# Altium PCB плата пельтье.PcbDoc
Units mm, origin at the board's own origin, x right, y up, seen from the top; angles counter-clockwise.
Board outline 50 x 50 mm, 4 copper layers (Top Layer, +5V, GND, Bottom Layer), stack 0.778 mm thick; 72 components, 65 nets, 252 pads, 42 vias.
Unrouted connection lines stored in the file: 6.
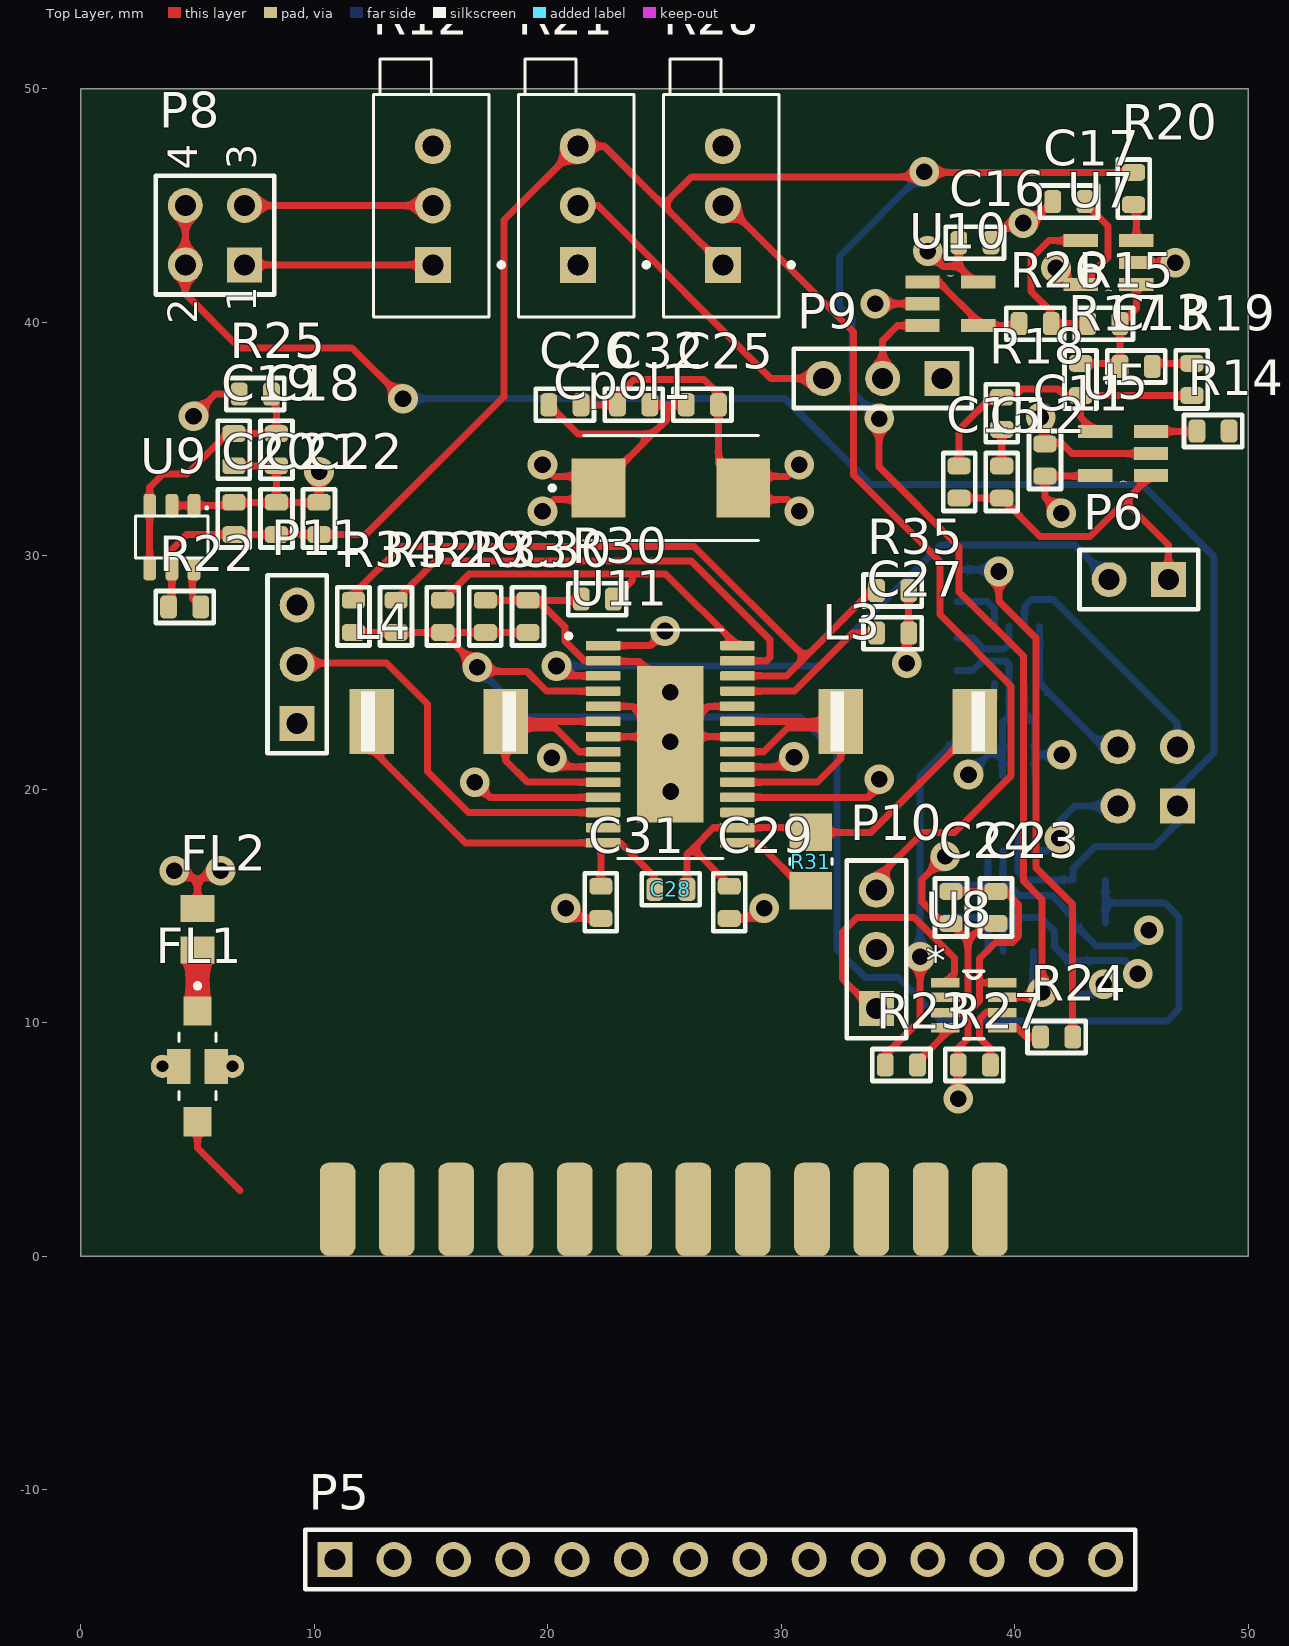
[diagram p0: Top Layer view]
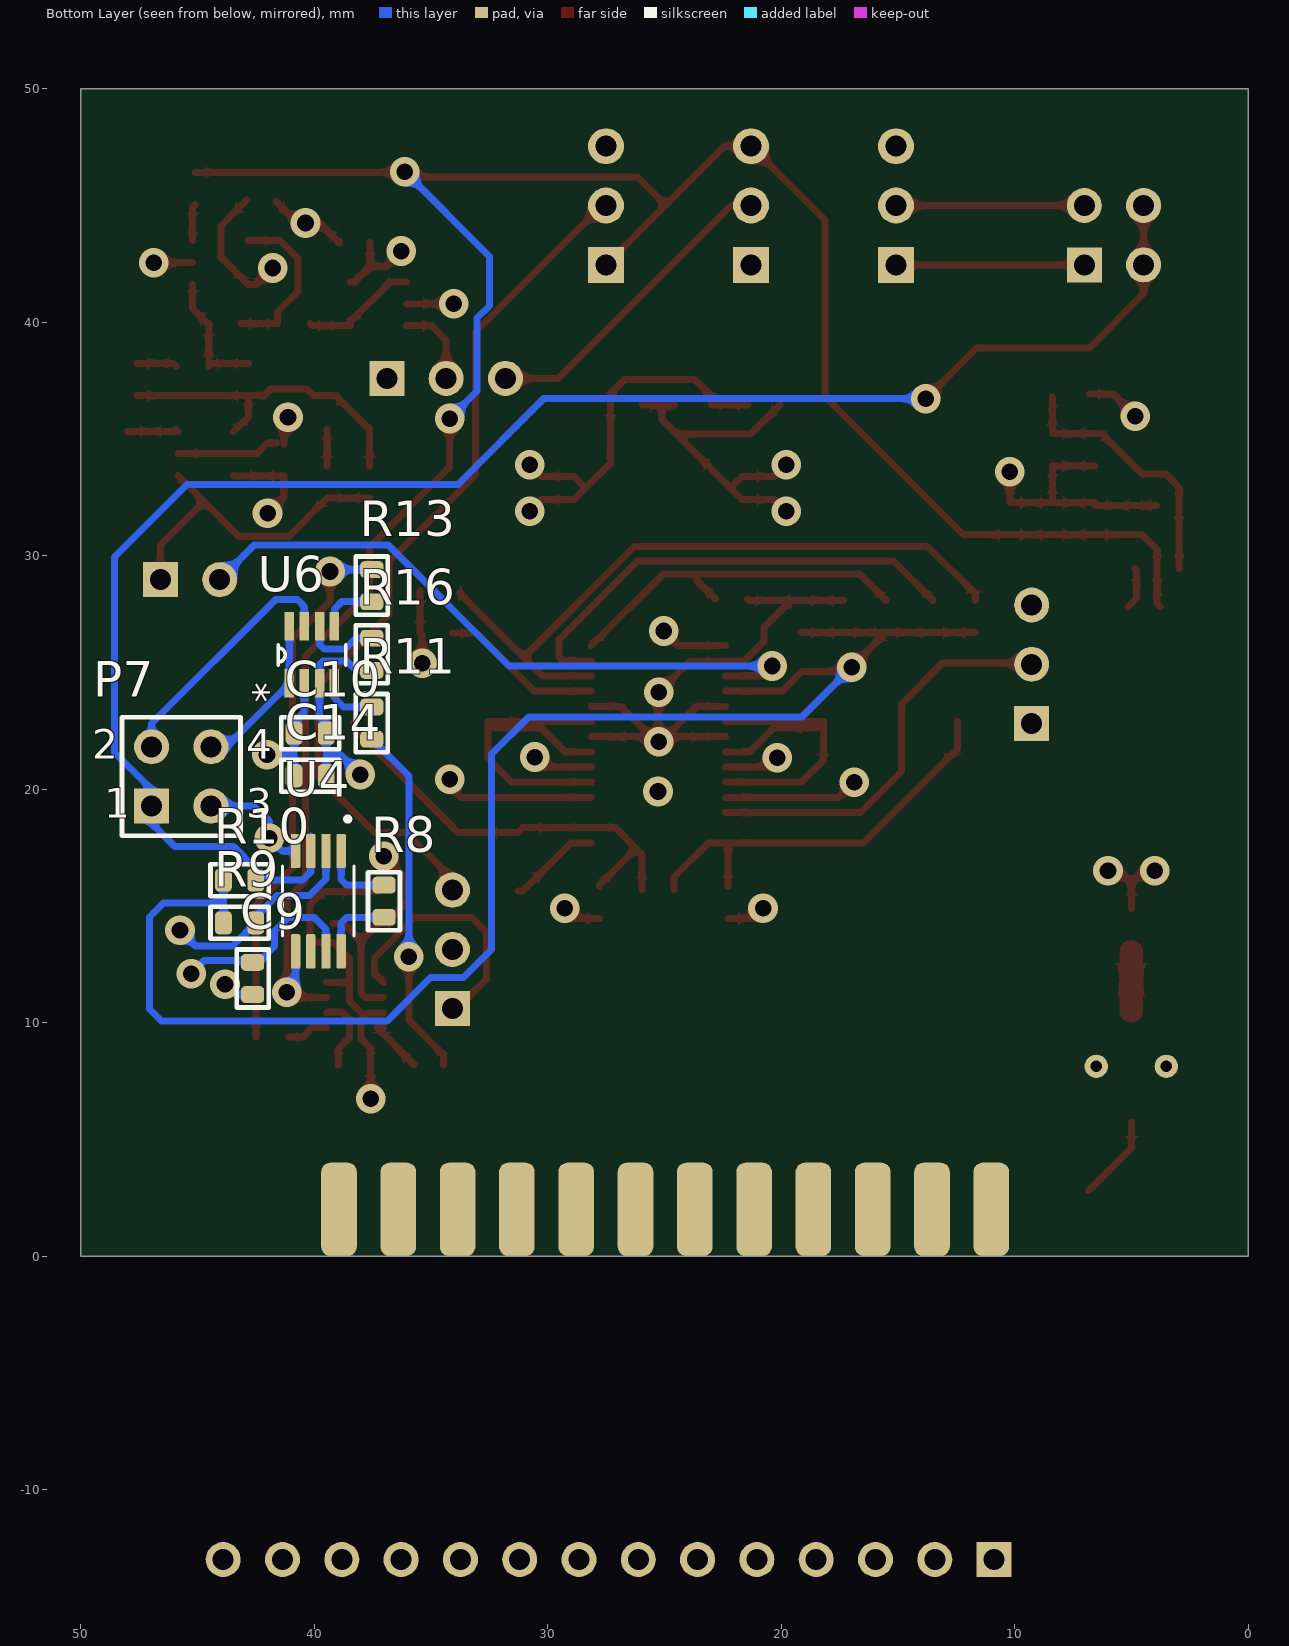
[diagram p1: Bottom Layer view, seen from below]
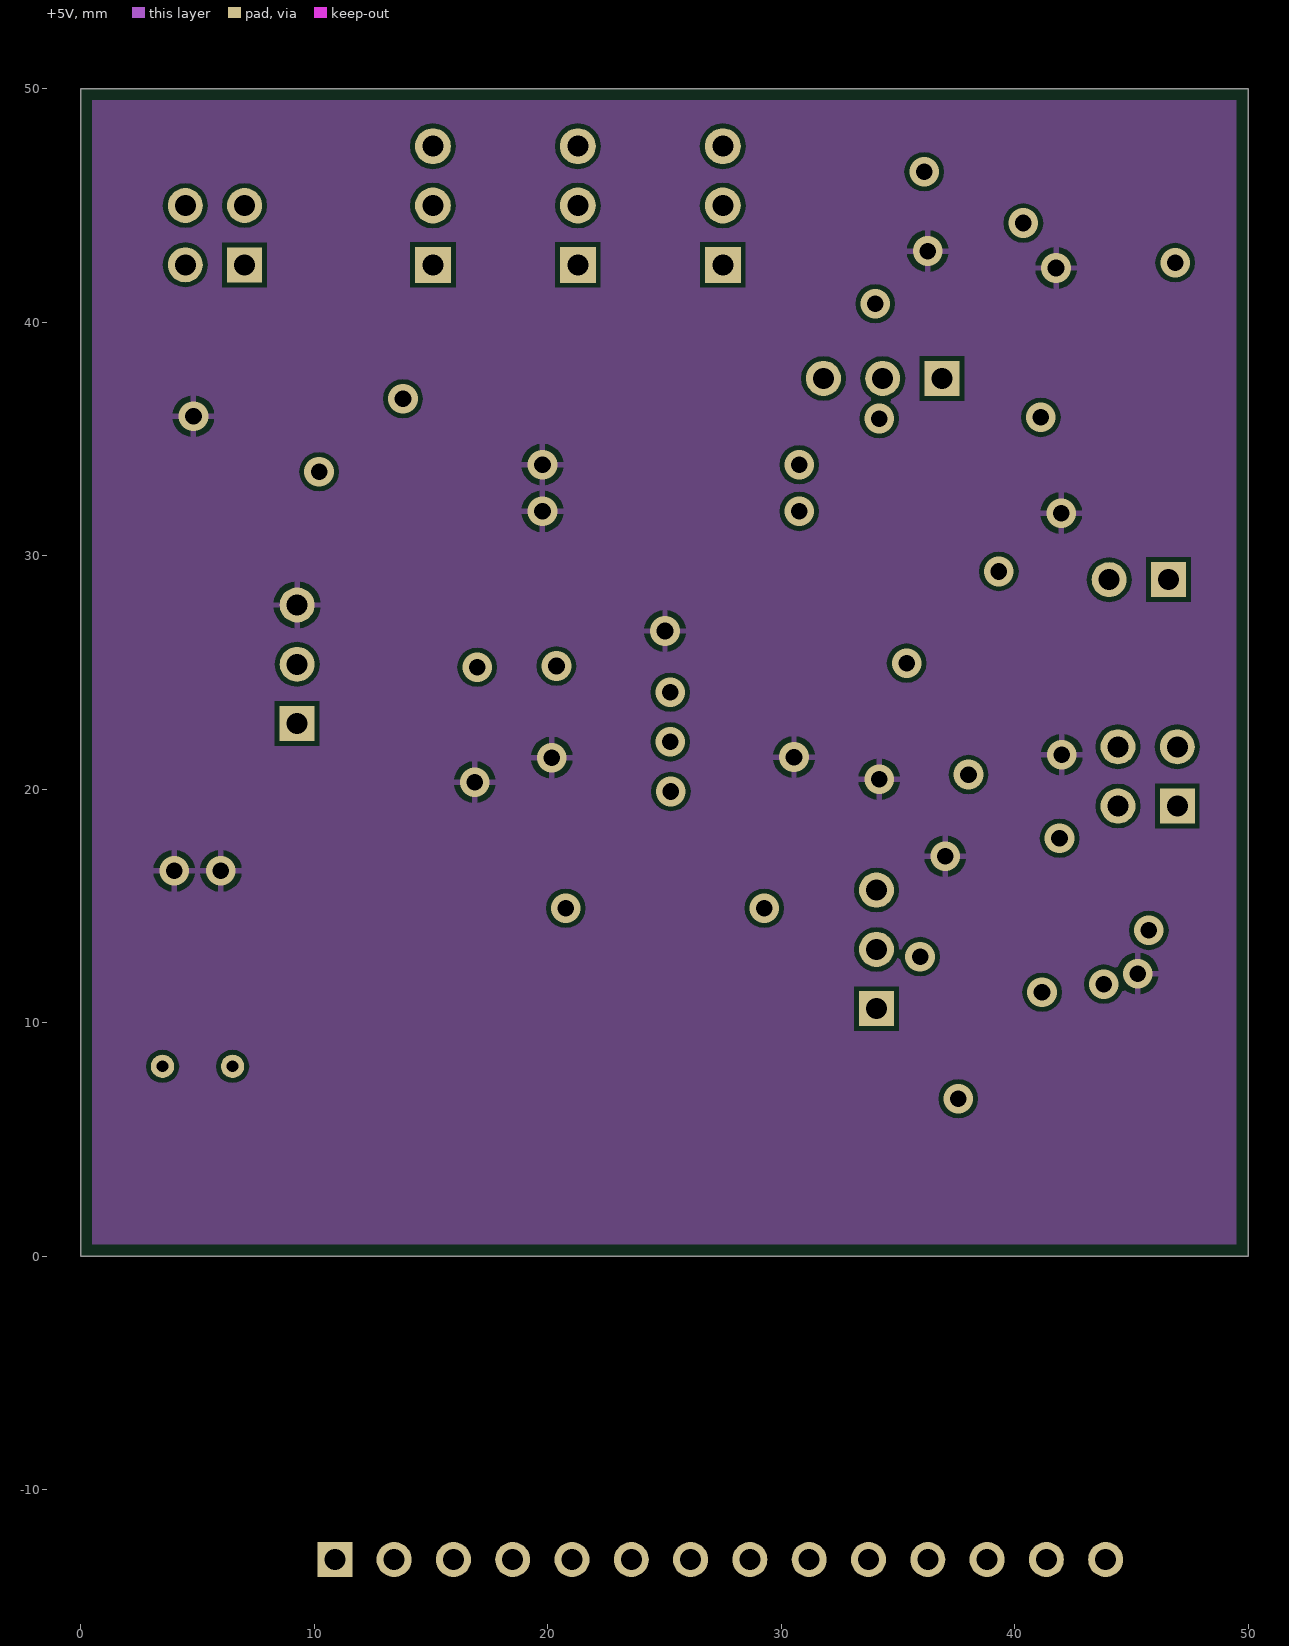
[diagram p2: +5V]
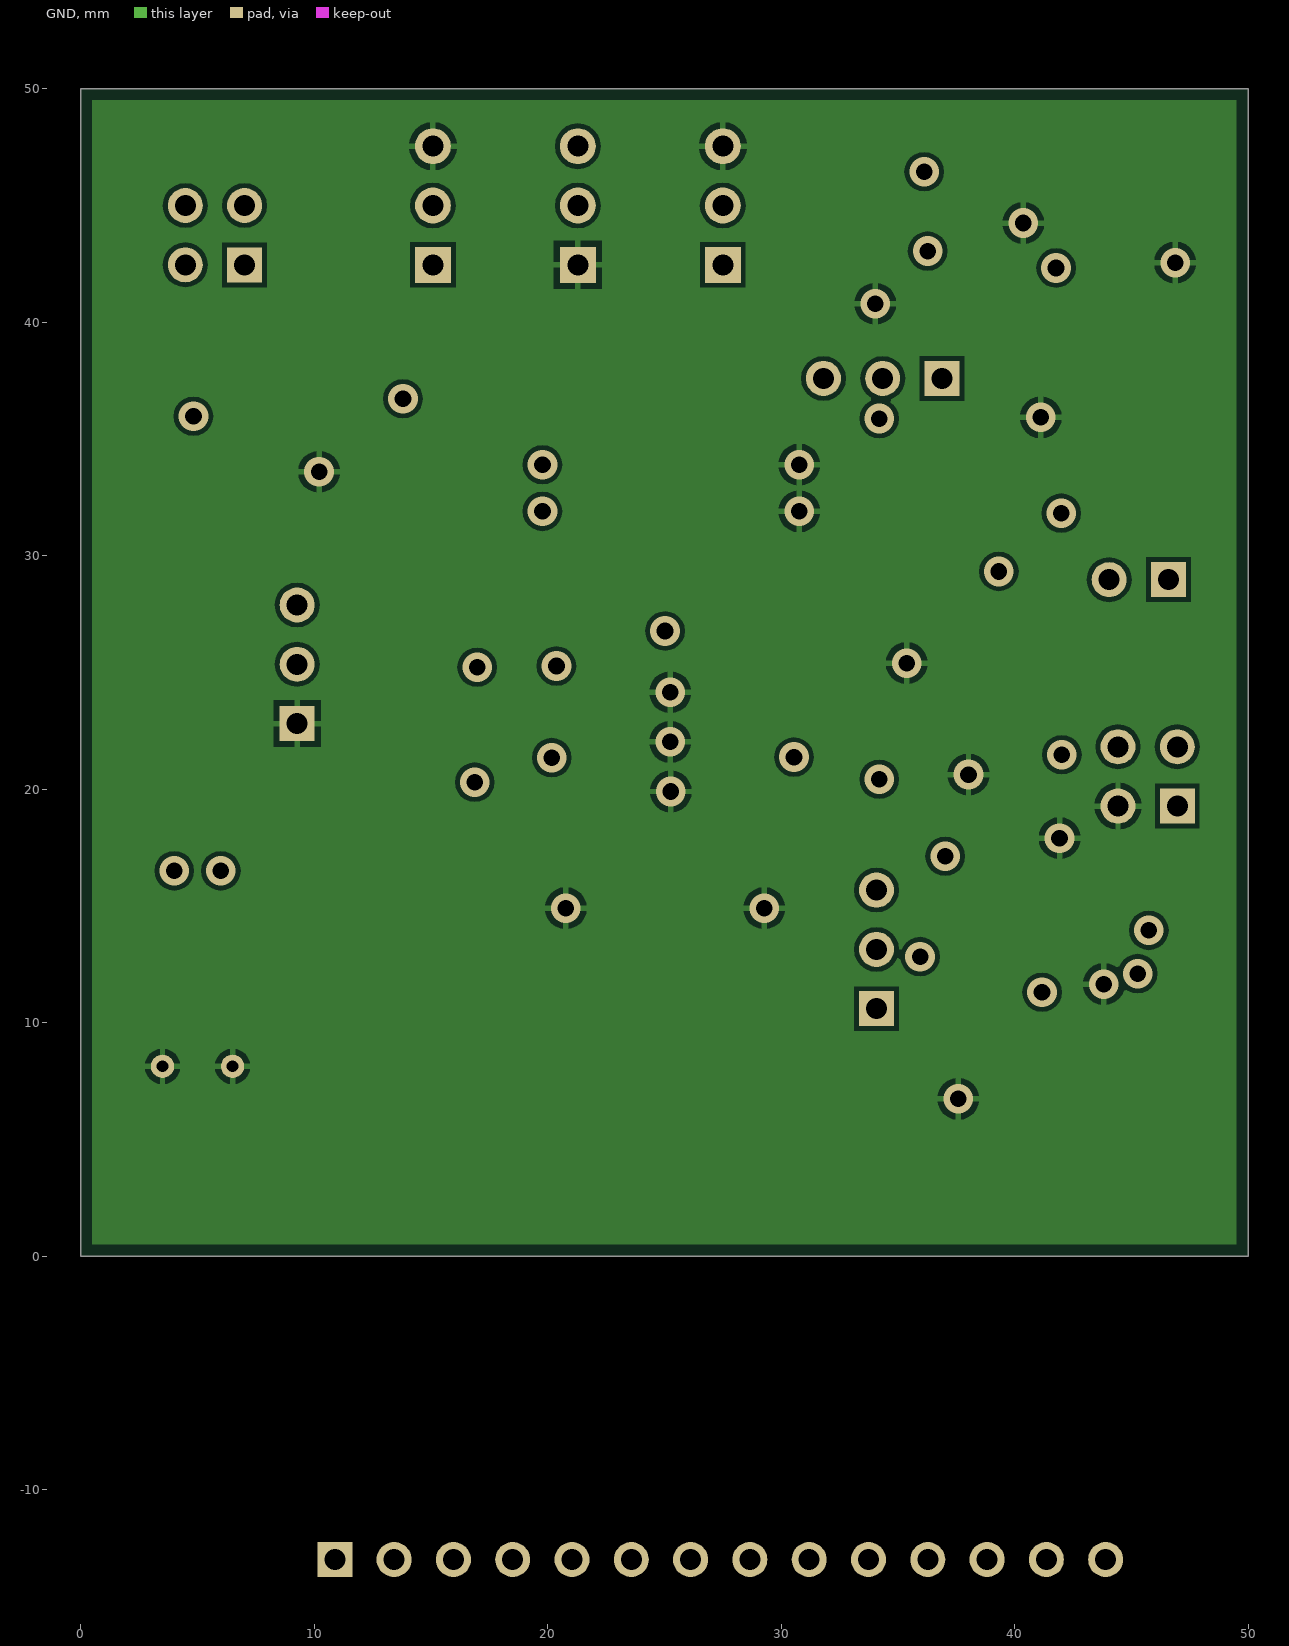
[diagram p3: GND]
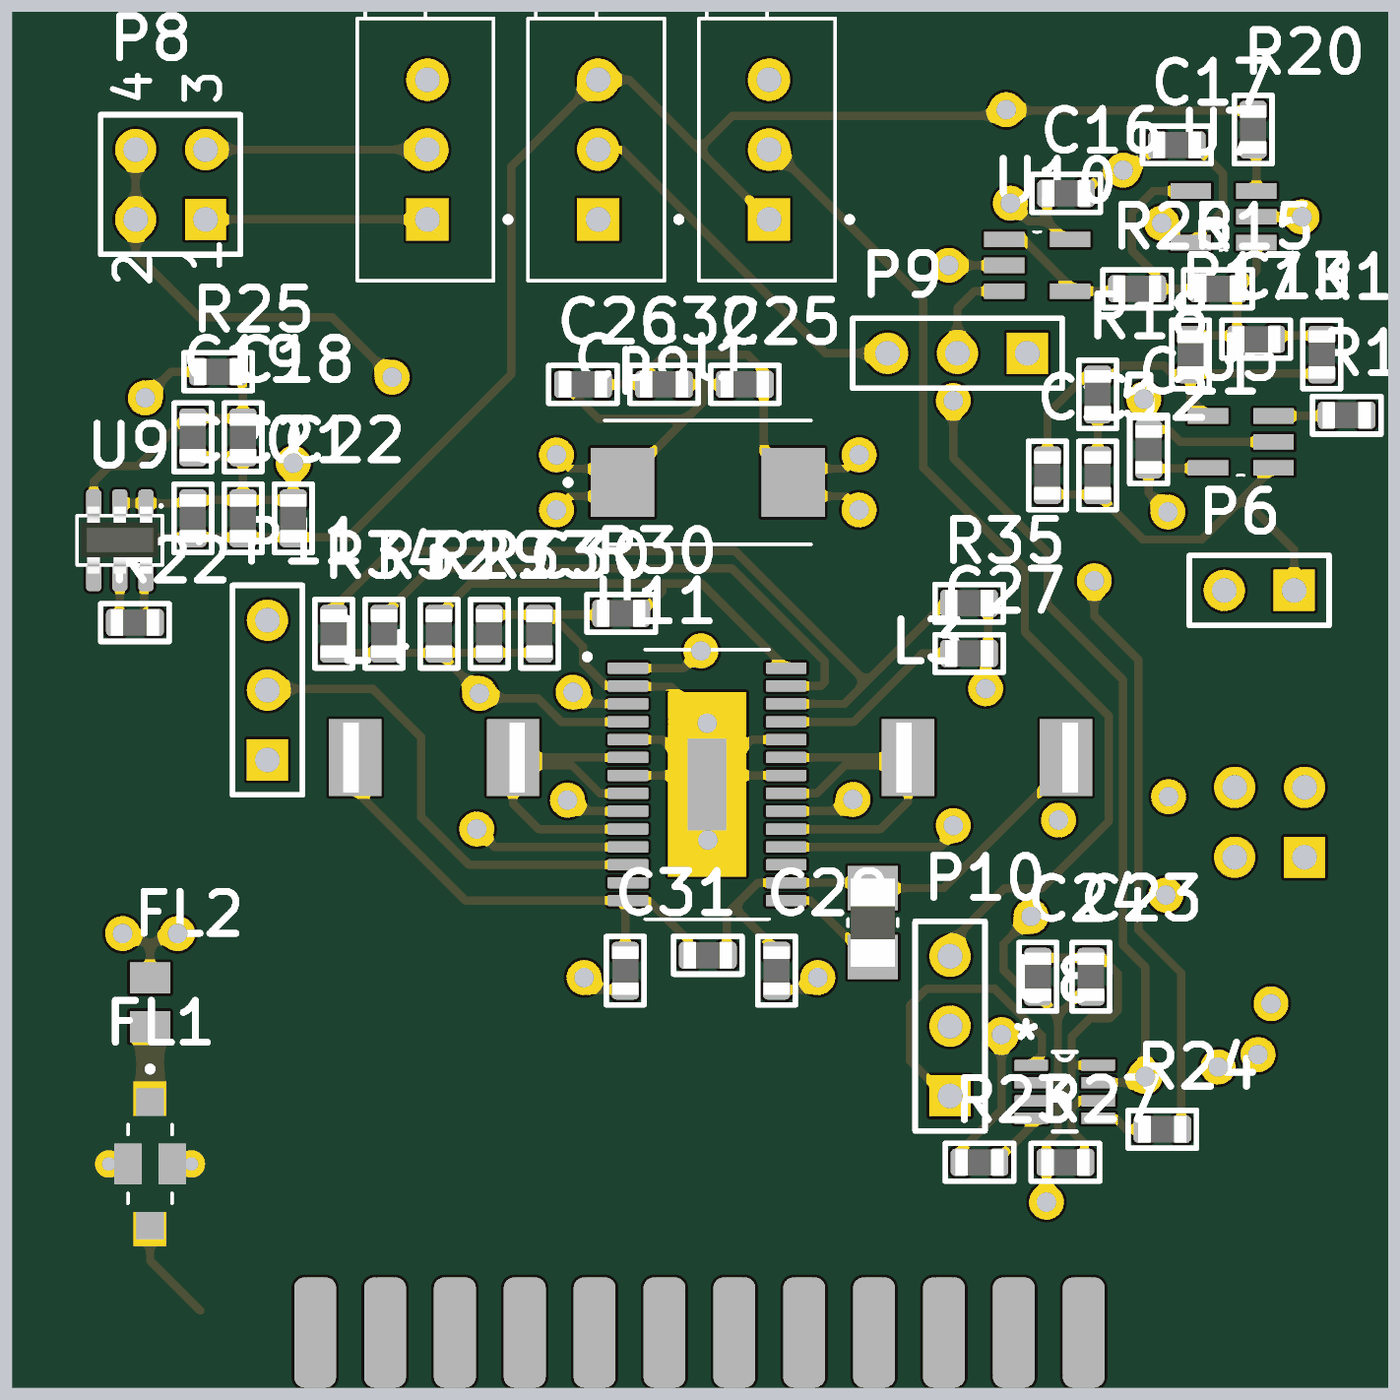
[diagram p4: 3D render of the assembled board from above, using the file's embedded part models]
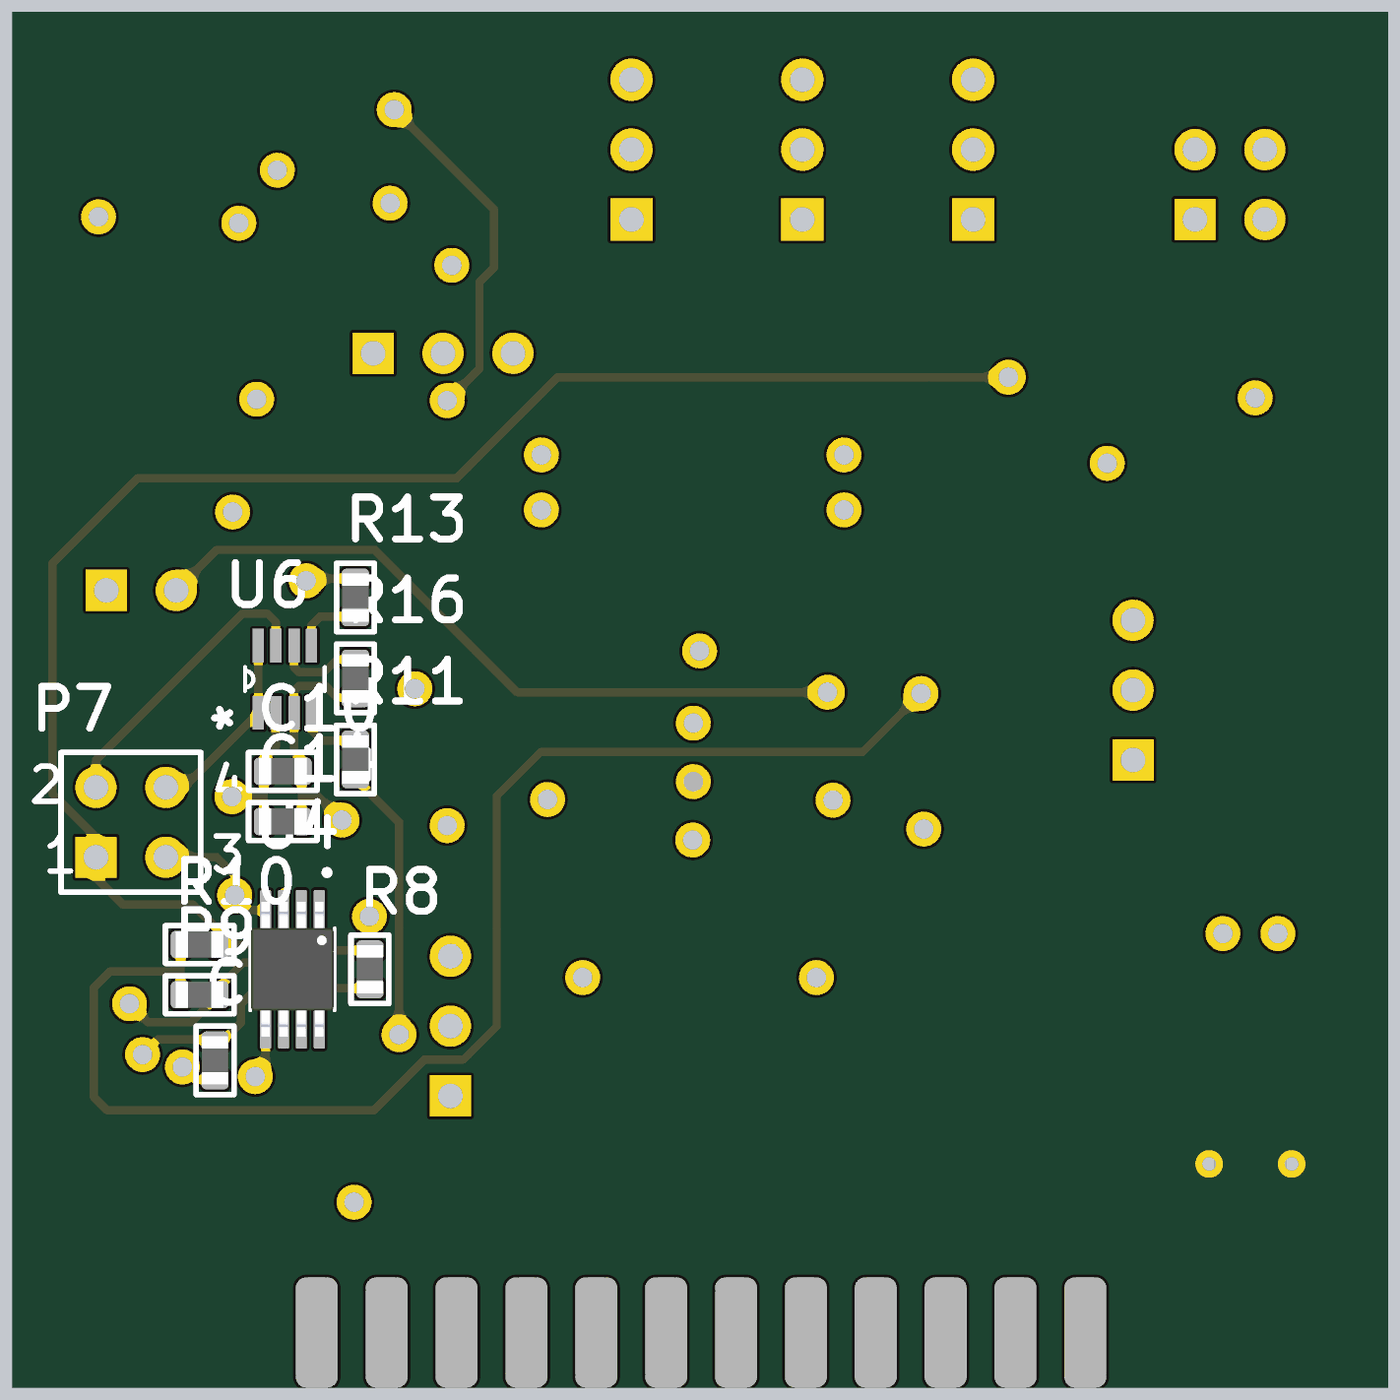
[diagram p5: 3D render of the assembled board from below, using the file's embedded part models]

## Layer stack, top to bottom
Top Solder: solder mask 0.0102, Solder Resist, Dk 3.5
Top Layer: signal copper 0.0356
Dielectric 1: core 0.254, FR-4, Dk 4.2
+5V: signal copper 0.036
Dielectric 3: prepreg 0.127, Dk 4.2
GND: signal copper 0.036
Dielectric 2: core 0.254, Dk 4.2
Bottom Layer: signal copper 0.0356
Bottom Solder: solder mask 0.0102, Solder Resist, Dk 3.5

## Board outline
0,0 50,0 50,50 0,50

## Design rules (kind name [scope] priority, off if disabled: settings)
Clearance [All] p1: gap=0.2
PolygonConnect [All] p1: connectstyle=Relief reliefconductorwidth=0.254 reliefentries=4 polygonreliefangle="90 Angle" airgapwidth=0.254
RoutingVias [All] p1: holewidth=0.711 width=1.27 viastyle="Through Hole" minholewidth=0.711 minwidth=1.27 maxholewidth=0.711 maxwidth=1.27
SolderMaskExpansion [All] p1: expansion=0.102
Width [All] p1: maxlimit=254 minlimit=0.254 preferedwidth=0.254
30 further rules are at their usual default settings.

## Components (designator, comment, footprint, x,y, rotation, side; value= is the part's Value field where it differs from the comment)
C9 "2,2uF" 0603 42.64,11.89 r90 bottom
C10 "100n" 0603 40.175,22.399 r0 bottom
C11 "1u" 0603 41.3,34.1 r270 top
C12 "10u" 0603 39.449,33.157 r90 top
C13 "1u" 0603 45.21,38.107 r180 top
C14 "10uF" 0603 40.175,20.573 r0 bottom
C15 "1u" 0603 37.623,33.157 r90 top
C16 "1u" 0603 38.3,43.408 r0 top
C17 "1u" 0603 42.325,45.17 r0 top
C18 "100n" 0603 8.379,34.54 r270 top
C19 "1u" 0603 6.554,34.54 r270 top
C20 "100n" 0603 6.554,31.597 r90 top
C21 "1u" 0603 8.379,31.597 r90 top
C22 "1u" 0603 10.205,31.597 r90 top
C23 "100n" 0603 39.2,14.931 r270 top
C24 "10uF" 0603 37.275,14.931 r270 top
C25 "1u" 0603 26.625,36.465 r0 top
C26 "1u" 0603 20.738,36.465 r0 top
C27 "0.01u" 0603 34.775,26.683 r180 top
C28 "10u" 0603 25.275,15.71 r180 top
C29 "1u" 0603 27.775,15.151 r90 top
C30 "0.1u" 0603 19.155,27.4 r90 top
C31 "1u" 0603 22.275,15.151 r270 top
C32 "0.1u" 0603 23.682,36.465 r0 top
Cpol1 "180uF" CAPPM7343X310N 25.275,32.9 r0 top
FL1 "NFM41PC155B1E3L" FIL_NFM41PC155B1E3L 5,8.125 r270 top
FL2 "BLM18SG700TN1D" BEADC2012X105N 5,14 r90 top
L3 "" IHLP 35.425,22.9 r180 top
L4 "" IHLP 15.325,22.9 r0 top
P5 "MHDR1X14" HDR1X14 10.88,-13 r0 top
P6 "Header 2" HDR1X2 46.59,28.975 r180 top
P7 "Header 2X2" HDR2X2 46.968,19.274 r180 bottom
P8 "Header 2X2" HDR2X2 7.015,42.46 r90 top
P9 "Header 3" HDR1X3 36.89,37.594 r180 top
P10 "Header 3" HDR1X3 34.082,10.596 r90 top
P11 "Header 3" HDR1X3 9.267,22.81 r90 top
R8 "10k" 0603 37.01,15.2 r270 bottom
R9 "20k" 0603 43.199,14.275 r0 bottom
R10 "20k" 0603 43.199,16.101 r0 bottom
R11 "50-300" 0603 37.536,22.832 r270 bottom
R12 "50k" TRIM_3296X-1-203LF 15.081,45 r180 top
R13 "50-300" 0603 37.536,28.718 r90 bottom
R14 "TRACE" 0603 48.5,35.34 r0 top
R15 "100k" 0603 43.824,39.94 r180 top
R16 "5k" 0603 37.536,25.775 r90 bottom
R17 "510k" 0603 42.825,37.549 r90 top
R18 "240k" 0603 39.449,36.1 r90 top
R19 "10k" 0603 47.594,37.55 r90 top
R20 "50k" 0603 45.1,45.728 r90 top
R21 "" TRIM_3296X-1-203LF 21.291,45 r180 top
R22 "10" 0603 4.45,27.805 r180 top
R23 "100" 0603 35.15,8.186 r180 top
R24 "100" 0603 41.8,9.386 r0 top
R25 "100" 0603 7.475,36.925 r180 top
R26 "10k" 0603 40.881,39.94 r0 top
R27 "5k" 0603 38.275,8.186 r0 top
R28 "50k" TRIM_3296X-1-203LF 27.5,45 r180 top
R29 "130k" 0603 15.503,27.4 r270 top
R30 "100k" 0603 22.125,28.14 r180 top
R31 "0,050" RESC3216X65N 31.275,16.9 r90 top
R32 "100k" 0603 13.503,27.4 r270 top
R33 "100k" 0603 17.329,27.4 r90 top
R34 "100k" 0603 11.677,27.4 r270 top
R35 "100k" 0603 34.775,28.509 r0 top
U4 "INA333" SOP65P490X110-8N 39.825,15.2 r270 bottom
U5 "AD8065ART-R2" SOT95P290X145-5N 44.65,34.375 r180 top
U6 "CAT5172" SOT65P280X100-8N 40.1,25.75 r90 bottom
U7 "AD8065ART-R2" SOT95P290X145-5N 44.025,42.555 r180 top
U8 "CAT5172" SOT65P280X100-8N 38.25,10.75 r0 top
U9 "REF3225" SOT23-6 3.9,30.797 r180 top
U10 "AD8065ART-R2" SOT95P290X145-5N 37.25,40.793 r0 top
U11 "MAX1968EUI+" SOP65P637X110-29N 25.25,21.925 r0 top

## Footprints (in the part's own frame and the unit in brackets; to place one, negate y for a bottom-side part, rotate by r counter-clockwise, add the part's x,y. Pads: shape width x height; smd on the part's side, far side on the other; paste and mask are expansions set on the pad)
0603 [mm]
  rrect50% 0.72x0.99 smd: 1(-0.69,0) 2(0.69,0)
  silkscreen extent -1.24,-0.69 1.24,0.69, body extent -0.87,-0.47 0.88,0.48, height 0.5
BEADC2012X105N [mm]
  rect 1.14x1.47 smd: 1(-0.89,0) 2(0.89,0)
CAPPM7343X310N [mm]
  rect 2.31x2.52 smd: 1(-3.1,0) 2(3.1,0)
  silkscreen extent -5.18,-2.25 3.75,2.25
FIL_NFM41PC155B1E3L [mm]
  rect 1.25x1.2 smd paste-2 mask+0: 1(-2.375,0) 3(2.375,0)
  rect 1.5x1 smd mask+0: 2(0,0.8) 2_1(0,-0.8)
  round 1 hole 0.5 mask+0: 2_3(0,1.5) 2_4(0,-1.5)
  silkscreen extent -3.55,-0.8 1.43,0.8
HDR1X2 [mm] "Connector; Header; 2 Position"
  rect 1.5x1.5 hole 0.9: 1(0,0)
  round 1.5 hole 0.9: 2(2.54,0)
  silkscreen extent -1.27,-1.27 3.81,1.27
HDR1X3 [mm] "Connector; Header; 3 Position"
  rect 1.5x1.5 hole 0.9: 1(0,0)
  round 1.5 hole 0.9: 2(2.54,0) 3(5.08,0)
  silkscreen extent -1.27,-1.27 6.35,1.27
HDR1X14 [mm]
  rect 1.5x1.5 hole 0.9: 1(0,0)
  round 1.5 hole 0.9: 2(2.54,0) 3(5.08,0) 4(7.62,0) 5(10.16,0) 6(12.7,0) 7(15.24,0) 8(17.78,0) 9(20.32,0) 10(22.86,0) 11(25.4,0) 12(27.94,0) 13(30.48,0) 14(33.02,0)
  silkscreen extent -1.27,-1.27 34.29,1.27
HDR2X2 [mm] "Connector; Header; 2x2 Position"
  rect 1.5x1.5 hole 0.9: 1(0,0)
  round 1.5 hole 0.9: 2(0,2.54) 3(2.54,0) 4(2.54,2.54)
  silkscreen extent -1.27,-1.27 3.81,3.81
IHLP [mil]
  rect 75x110 smd: 1(-113,0) 2(113,0)
  silkscreen extent -130,-50 130,50
RESC3216X65N [mm]
  rect 1.61x1.82 smd: 1(-1.253,0) 2(1.253,0)
  silkscreen extent -0.13,-0.9 0.13,0.9, body extent -1.6,-0.8 1.6,0.8, height 0.65
SOP65P490X110-8N [mm]
  rrect25% 1.47x0.4 smd: 1(-2.15,0.975) 2(-2.15,0.325) 3(-2.15,-0.325) 4(-2.15,-0.975) 5(2.15,-0.975) 6(2.15,-0.325) 7(2.15,0.325) 8(2.15,0.975)
  silkscreen extent -3.62,-1.54 1.5,1.54, body extent -2.45,-1.5 2.45,1.5, height 1.1
SOP65P637X110-29N [mm]
  rrect25% 1.48x0.41 smd: 1(-2.875,4.225) 2(-2.875,3.575) 3(-2.875,2.925) 4(-2.875,2.275) 5(-2.875,1.625) 6(-2.875,0.975) 7(-2.875,0.325) 8(-2.875,-0.325) 9(-2.875,-0.975) 10(-2.875,-1.625) 11(-2.875,-2.275) 12(-2.875,-2.925) 13(-2.875,-3.575) 14(-2.875,-4.225) 15(2.875,-4.225) 16(2.875,-3.575) 17(2.875,-2.925) 18(2.875,-2.275) 19(2.875,-1.625) 20(2.875,-0.975) 21(2.875,-0.325) 22(2.875,0.325) 23(2.875,0.975) 24(2.875,1.625) 25(2.875,2.275) 26(2.875,2.925) 27(2.875,3.575) 28(2.875,4.225)
  rect 2.85x6.7 smd paste-4: 29(0,0)
  silkscreen extent -4.45,-4.9 2.25,4.9
SOT23-6 [mm]
  rrect50% 0.55x1 smd: 1(-0.95,-1.35) 2(0,-1.35) 3(0.95,-1.35) 4(0.95,1.35) 5(0,1.35) 6(-0.95,1.35)
  silkscreen extent -1.55,-1.3 1.55,0.9, body extent -1.4,-1.22 1.4,1.21, height 1.09
SOT65P280X100-8N [mil]
  rect 48x16 smd: 1(-48,38) 2(-48,13) 3(-48,-13) 4(-48,-38) 5(48,-38) 6(48,-13) 7(48,13) 8(48,38)
  silkscreen extent -17,-57 17,57
SOT95P290X145-5N [mil]
  rect 58x22 smd: 1(-47,37) 2(-47,0) 3(-47,-37) 4(47,-37) 5(47,37)
  silkscreen extent -5,47 5,48
TRIM_3296X-1-203LF [mm]
  rect 1.54x1.54 hole 0.9: 1(0,2.54)
  round 1.54 hole 0.9: 2(0,0) 3(0,-2.54)
  silkscreen extent -3.03,-6.28 2.55,4.76

## Part data
C9 C10 C11 C12 C13 C14 C15 C16 C17 C18 C19 C20 C21 C22 C23 C24 C25 C26 C27 C28 C29 C30 C31 C32: library part _capacitor
Cpol1: library part "Cap Pol2", "Polarized Capacitor (Axial)"
FL1: "?s???????µ??N??°N‚??N€ SMD N? ?µ??????N?N‚N?NZ: 1.5 ???s?¤ ?????». 20%. ???????????°?»N??????µ ???°??N€N??¶?µ?????µ: 25Vdc"
FL2: library part BLM21SP111SN1D, "110 ???? @ 100 ???“N† 1 ?»??????N? N??»?µ??N‚N€?????µN€?µ???°N‡ N„?µN€N€??N‚????N‹?? N??°N€???? 0805 (2012 ???µN‚N€?????°) 5A"
L3 L4: library part LQH5BPN3R3NT0L, "??????N???N‚??N€ N? ??????N???N‚????????N?N‚N?NZ: 3,3 uH Tol. + / -30%, ???°???µN‚: 2020 (5050)"
P5: "Header, 14-Pin"
P6: "Header, 2-Pin"
P7 P8: "Header, 2-Pin, Dual row"
P9 P10 P11: "Header, 3-Pin"
R8 R9 R10 R11 R13 R14 R15 R16 R17 R18 R19 R20 R22 R23 R24 R25 R26 R27 R29 R30 R31 R32 R33 R34 R35: library part _resistor
R12 R28: library part _resistor_pot, "3224J"
R21: library part 3296W-1-224LF, "Trimmer Resistors - Through Hole"
U5 U7 U10: "??N????»??N‚?µ?»N? ???±N€?°N‚?????? N???N??·?? ???? ???°??N€N??¶?µ????NZ 1 N†?µ??N? N€?µ?»N?N?-N€?µ?»N?N? SOT-23-5"
U6 U8: "Digital potentiometr 256-position SPI"
U9: library part REF32XX, "SERIES VOLTAGE REFERENCE"
U11: "Thermoelectric Cooler PMIC 28-TSSOP-EP"

## Free pads (board coordinates)
  rrect50% 1.524x4 smd far side: 2(23.7,2) 3(26.24,2) 4(28.78,2) 5(31.32,2) 6(33.86,2) 7(36.4,2) 8(38.94,2) 9(21.16,2) 10(18.62,2) 11(16.08,2) 12(13.54,2) 13(11,2)
  rrect50% 1.524x4 smd: 2(26.24,2) 3(23.7,2) 4(21.16,2) 5(18.62,2) 6(16.08,2) 7(13.54,2) 8(11,2) 9(28.78,2) 10(31.32,2) 11(33.86,2) 12(36.4,2) 13(38.94,2)

## Via types
v1: diameter 1.27, hole 0.711, Top Layer to Bottom Layer, 42 vias

## Nets (pads, with @x,y where several pads share a name; then routed paths per layer and width w, separated by ;. In a path a pad name is that pad's centre, name@x,y a point inside that pad or via, vN(x,y) a via of type N, cw(c..) or ccw(c..) an arc to the next point about the centre after c; other vN are vias at no path point)
3.3V: 
+5_POWER: FL1.3 | length 3.7
  Top Layer w0.3: FL1.3 5,4.625 6.825,2.8
+5V: C9.2 C10.2 C11.2 C14.2 C16.1 C17.2 C23.2 C24.2 C25.1 C26.1 C32.2 Cpol1.1 FL2.2 P11.3 R25.2 U4.7 U5.5 U6.2 U7.5 U8.2 U10.5 U11.1 U11.9 U11.11 U11.18 U11.20 | length 79.1
  Top Layer w0.3: v1@4.5,16.5 5,16 ; v1(4.825,35.975) 5.775,36.925 R25.2 ; FL2.2 5,16 ; v1@5.5,16.5 5,16 ; v1(16.875,20.3) 17.525,19.65 U11.11 ; v1(19.775,31.9) 20.275,32.4 21.675,32.4 Cpol1.1 ; v1(19.775,33.9) 20.275,33.4 21.675,33.4 Cpol1.1 ; C26.1 21.301,35.212 24.488,35.212 ; v1@20.05,21.175 20.275,20.95 U11.9 ; U11.1 24.4,26.15 v1(25.025,26.775) ; C32.2@24.565,36.465 25.1,36.465 ; 25.1,36.475 25.1,36.465 ; C25.1 25.1,36.465 ; U11.18 33.725,19.65 34.2,20.125 v1(34.2,20.425) ; U11.20 30.425,20.95 v1@30.7,21.225 ; v1(36.275,43.05) 36.935,42.39 37.61,42.39 ; v1(37.025,17.125) 36.025,16.125 36.025,15.175 36.959,14.241 C24.2 38,13.516 ; U8.2 37.805,11.08 38,11.275 38,13.516 ; C16.1 37.61,42.39 ; U10.5 38.267,41.733 37.61,42.39 ; C23.2 38.725,14.241 38,13.516 ; v1(41.775,42.325) 42.485,41.615 U7.5 44,42.784 44,44.125 C17.2@42.891,45.234 ; v1(42,31.825) 41.3,32.525 C11.2 43.431,33.41 U5.5 ; Cpol1.1 24.488,35.212 ; 24.488,35.212 25.1,35.825 25.1,36.465
  Bottom Layer w0.3: U4.7 39.5,14 40,14.5 41.125,14.5 41.7,13.925 41.7,13.258 C9.2@42.509,12.449 ; U6.2 40.43,23.295 40.865,22.86 C10.2 40.865,21.475 ; C14.2 40.865,21.475 ; v1(42.025,21.475) 40.865,21.475 ; C9.2 42.71,12.65 44.725,12.65 v1(45.275,12.1)
  other v1: 4,16.5 6,16.5 20.175,21.35 30.55,21.375
+5V(AN): P5.12
+12V: 
A0: U4.6
CLTI: P10.2
CS: C28.1 C29.2 L3.1 R31.2 U11.16 | length 18.8
  Top Layer w0.3: C28.1 25.965,17.21 26.215,17.46 ; C29.2 27.775,15.9 26.215,17.46 ; L3.1 38.295,22.595 33.853,18.153 R31.2 31.078,18.35 U11.16 27.105,18.35 26.215,17.46
CTLI: P6.2 U11.3 | length 28.7
  Top Layer w0.3: v1(20.375,25.275) 20.375,25.05 20.575,24.85 U11.3
  Bottom Layer w0.3: v1(20.375,25.275) 31.65,25.275 36.825,30.45 42.575,30.45 P6.2
DAC: P9.1
GND: C9.1 C10.1 C11.1 C14.1 C16.2 C17.1 C18.2 C19.2 C20.2 C21.2 C22.2 C23.1 C24.1 C25.2 C26.2 C27.1 C29.1 C30.2 C31.2 C32.1 Cpol1.2 FL1.2 FL1.2_1 FL1.2_3 FL1.2_4 P5.5 P7.3 P11.1 R12.3 R16.1 R21.1 R27.1 R28.3 R30.2 R33.2 R35.2 U4.4 U5.2 U6.3 U7.2 U8.3 U8.8 U9.1 U9.2 U10.2 U11.2 U11.5 U11.7 U11.22 U11.24 U11.29 | length 103
  Top Layer w0.3: U9.2 U9.1 C20.2@6.554,32.147 ; C20.2@6.554,32.272 10.19,32.272 C22.2 v1(10.205,33.597) v1@10.205,33.702 ; C19.2 C18.2 C21.2 ; R33.2 C30.2 C30.2@19.585,28.09 ; v1(20.775,14.9) 21.214,14.461 C31.2 ; C26.2 C32.1 22.992,36.842 23.7,37.55 26.7,37.55 27.315,36.935 C25.2 27.315,33.96 Cpol1.2 ; R30.2 21.385,28.09 C30.2@19.585,28.09 ; U11.7 24.925,22.25 23.625,23.55 U11.5 ; v1(25.25,22.025) v1(25.25,24.15) 23.925,25.475 22.4,25.475 U11.2 21.575,25.5 20.737,26.337 20.737,26.937 C30.2@19.585,28.09 ; C29.1 28.836,14.461 v1(29.275,14.9) ; U11.22 25.575,22.25 26.875,23.55 U11.24 ; v1(30.775,31.9) 30.275,32.4 28.875,32.4 Cpol1.2 ; v1(30.775,33.9) 30.275,33.4 28.875,33.4 Cpol1.2 ; v1(34.032,40.793) U10.2 ; v1(35.375,25.4) 35.375,26.593 C27.1 R35.2 ; U8.3 37.705,10.42 37.85,10.275 ; C24.1 C23.1 39.604,15.621 40.175,15.05 40.175,13.7 39.9,13.425 39.175,13.425 38.5,12.75 38.5,11.675 ; v1(37.585,6.735) R27.1 37.585,8.91 38,9.325 38,10.125 37.85,10.275 ; C16.2 C16.2@38.961,43.436 ; U8.8 38.54,11.715 38.5,11.675 ; v1(41.125,35.925) 41.3,35.75 C11.1 ; C11.1@41.6,34.825 42,34.825 42.45,34.375 U5.2 ; C17.1 40.82,44.355 39.88,44.355 C16.2@38.961,43.436 ; U7.2 v1(46.875,42.555) ; 37.85,10.275 38.5,10.925 38.5,11.675 ; C16.2@38.961,43.436 38.925,43.473 38.925,43.4 C16.2@38.961,43.436
  Bottom Layer w0.3: R16.1 38.21,25.085 38.625,25.5 39.6,25.5 39.77,25.33 U6.3 39.77,23.12 39.485,22.835 C10.1 39.485,21.486 ; v1(38.025,20.625) 38.886,21.486 39.485,21.486 ; C14.1 39.485,21.486 ; U4.4 41.375,17.35 v1(41.925,17.9) 41.925,18.625 42.574,19.274 P7.3 ; C9.1 43.375,11.2 v1(43.825,11.65)
  other v1: 25.275,19.9 40.375,44.25
GND_CROSS: P5.11
ITEC: U11.13
MOSI: R13.2 R24.2 | length 23.1
  Top Layer w0.3: v1(39.325,29.325) 39.325,28.05 40.925,26.45 40.925,16.625 42.49,15.06 R24.2
  Bottom Layer w0.3: R13.2 39.242,29.408 v1(39.325,29.325)
NetC12_1: C12.1 C15.1 P6.1 U5.1 | length 14.1
  Top Layer w0.3: C15.1 C12.1 41.091,30.825 43.234,30.825 44.729,32.321 ; U5.1 44.729,32.321 ; P6.1 46.59,30.46 44.729,32.321
NetC12_2: C12.2 R18.1 | length 1.6
  Top Layer w0.3: C12.2 R18.1
NetC13_1: C13.1 R19.2 | length 1.7
  Top Layer w0.3: C13.1 46.032,38.24 R19.2
NetC13_2: C13.2 R15.1 R17.2 U7.1 | length 5.6
  Top Layer w0.3: R17.2 44.388,38.239 C13.2 44.52,39.935 R15.1 44.565,39.94 45.219,40.594 U7.1
NetC15_2: C15.2 R17.1 R18.2 R19.1 U5.4 | length 14.2
  Top Layer w0.3: C15.2 37.623,35.398 39.085,36.86 39.449,36.86 39.45,36.859 40.034,36.859 40.325,37.15 41.85,37.15 42.141,36.859 R17.1 ; U5.4 42.825,35.946 R17.1 ; R19.1@47.594,36.859 R17.1
NetC18_1: C18.1 C19.1 R25.1 U9.3 U9.4 | length 11.4
  Top Layer w0.3: U9.4 U9.3 2.95,32.922 3.525,33.497 4.55,33.497 6.283,35.23 C18.1 R25.1@8.379,36.793
NetC27_2: C27.2 U11.25 | length 7
  Top Layer w0.3: U11.25 30.575,24.2 33.058,26.683 C27.2
NetF1_2: 
NetFL1_1: FL1.1 FL2.1 | length 2.5
  Top Layer w1: FL1.1 FL2.1@5,13.035
NetFL3_1: 
NetFL4_2: 
NetL3_2: L3.2 U11.19 U11.21 U11.23 | length 15.8
  Top Layer w0.3: U11.19 31.55,20.3 32.555,21.305 L3.2 ; U11.21 29.25,21.6 30.275,22.625 32.28,22.625 L3.2 U11.23
NetL4_2: L4.2 U11.6 U11.8 U11.10 | length 15.1
  Top Layer w0.3: U11.10 19.125,20.3 18.195,21.23 L4.2 ; U11.8 21.35,21.6 20.325,22.625 18.47,22.625 L4.2 ; U11.6 L4.2
NetP7_1: P7.1 P8.2 P8.4 R10.1 U4.3 | length 74.4
  Top Layer w0.3: P8.4 P8.2 4.475,41.225 6.8,38.9 11.625,38.9 v1(13.8,36.725)
  Bottom Layer w0.3: v1(13.8,36.725) 30.175,36.725 33.85,33.05 45.45,33.05 48.55,29.95 48.55,21.575 46.968,19.993 P7.1 46.968,18.543 45.975,17.55 43.45,17.55 42.509,16.609 R10.1 40.499,16.101 40.15,16.45 U4.3 U4.3@40.15,18
NetP7_2: P7.2 U6.7 | length 10.7
  Bottom Layer w0.3: U6.7 40.43,27.83 40.725,28.125 41.65,28.125 46.968,22.807 P7.2
NetP7_4: P7.4 U6.1 U6.8 | length 6.9
  Bottom Layer w0.3: U6.8 U6.1 43.782,21.814 P7.4
NetP8_1: P8.1 R12.1 | length 8.1
  Top Layer w0.3: P8.1 R12.1
NetP8_3: P8.3 R12.2 | length 8.1
  Top Layer w0.3: P8.3 R12.2
NetP9_2: P9.2 U10.3 | length 3.6
  Top Layer w0.3: P9.2 34.35,39.225 34.978,39.853 U10.3
NetP9_3: P9.3 R21.2 | length 13.6
  Top Layer w0.3: R21.2 22.15,45 29.556,37.594 P9.3
NetP10_1: P10.1 U8.1 | length 11
  Top Layer w0.3: P10.1 33.904,10.596 32.625,11.875 32.625,13.875 33.25,14.5 35.7,14.5 37.425,12.775 37.425,12.109 U8.1
NetP10_3: P10.3 R28.2 | length 37.3
  Top Layer w0.3: R28.2 27.675,45 33.1,39.575 33.1,33.45 36.8,29.75 36.8,27.475 39.85,24.425 39.85,20.575 37.425,18.15 36.075,18.15 P10.3@34.05,16.125
NetP11_2: P11.2 U11.12 | length 17.5
  Top Layer w0.3: P11.2@9.267,25.4 13.1,25.4 14.85,23.65 14.85,20.75 16.6,19 U11.12
NetR8_1: R8.1 U4.1 | length 3.2
  Bottom Layer w0.3: R8.1 38.615,15.89 38.85,16.125 U4.1
NetR8_2: R8.2 U4.8 | length 3.2
  Bottom Layer w0.3: R8.2 38.615,14.51 38.85,14.275 U4.8
NetR11_1: R11.1 U6.4 | length 2.4
  Bottom Layer w0.3: R11.1 38.747,23.522 39.135,23.91 U6.4
NetR13_1: R13.1 U6.5 | length 2.5
  Bottom Layer w0.3: R13.1 38.822,28.028 39.135,27.715 U6.5
NetR14_1: R14.1 U5.3 | length 2.2
  Top Layer w0.3: U5.3 U5.3@45.929,35.4 ; U5.3@45.929,35.325 R14.1@48,35.325
NetR15_2: R15.2 R26.2 U7.4 | length 7.2
  Top Layer w0.3: U7.4 41.47,43.495 40.7,42.725 40.7,41.325 41.571,40.454 R26.2 R15.2
NetR22_1: R22.1 U9.6 | length 1.8
  Top Layer w0.3: U9.6 4.775,29.372 4.775,28.17 R22.1
NetR23_1: R23.1 U8.4 | length 2.5
  Top Layer w0.3: R23.1@35.715,8.186 37.314,9.785 U8.4
NetR24_1: R24.1 U8.5 | length 1.8
  Top Layer w0.3: U8.5 40.09,9.785 40.489,9.386 R24.1
NetR26_1: R26.1 U10.1 U10.4 | length 5.1
  Top Layer w0.3: U10.1 36.742,41.733 38.444,40.031 U10.4 40.104,39.853 R26.1
NetR29_1: R29.1 R30.1 U11.28 | length 15.8
  Top Layer w0.3: R29.1 16.638,29.225 23.625,29.225 ; R30.1 23.625,28.95 23.625,29.225 ; U11.28 25.05,29.225 23.625,29.225
NetR32_1: R32.1 U11.27 | length 20.3
  Top Layer w0.3: R32.1 15.188,29.775 26.15,29.775 29.525,26.4 29.525,25.65 29.375,25.5 U11.27
NetR34_1: R34.1 R35.1 U11.26 | length 29.5
  Top Layer w0.3: R34.1 11.677,28.352 13.725,30.4 26.275,30.4 31.025,25.65 ; U11.26 30.225,24.85 31.025,25.65 ; R35.1@33.775,28.4 31.275,25.9 31.025,25.65
ON_OFF_DC: P5.7
ON_TEC: U11.17
POT_CLK: P5.8
POT_SDI: P5.9
REF: C30.1 R9.2 R10.2 R29.2 R32.2 R33.1 R34.2 U11.4 | length 66
  Top Layer w0.3: R34.2 R32.2 R29.2 ; C30.1 R33.1 R29.2 ; U11.4 19.95,24.2 19.1,25.05 17.163,25.05 R29.2
  Bottom Layer w0.3: v1(16.975,25.225) 19.1,23.1 30.8,23.1 32.4,21.5 32.4,13.125 33.6,11.925 35.025,11.925 36.875,10.075 46.55,10.075 47.05,10.575 47.05,14.525 46.45,15.125 43.889,15.125 ; R9.2 43.889,15.125 ; R10.2 43.889,15.125
"REF+2,5 V": C20.1 C21.1 C22.1 R20.2 R21.3 R22.2 R28.1 U4.5 U8.7 U9.5 | length 104.5
  Top Layer w0.3: R22.2 3.9,27.945 U9.5 3.9,30.272 4.535,30.907 C20.1 C22.1 12.207,30.907 18.125,36.825 18.125,44.374 R21.3 22.42,47.54 24.942,45.017 ; R28.1 24.942,45.017 ; v1(34.2,35.875) 34.2,33.8 37.625,30.375 37.625,28.45 40.375,25.7 40.375,16.075 41.175,15.275 v1(41.175,11.3) 40.955,11.08 U8.7 ; R20.2 36.125,46.418 35.932,46.225 26.15,46.225 24.942,45.017
  Bottom Layer w0.3: v1(34.2,35.875) 33.025,37.05 33.025,40.175 32.5,40.7 32.5,42.825 v1(36.125,46.45) ; U4.5 40.8,11.675 v1(41.175,11.3)
RT1: P5.6 R9.1 U4.2 | length 9.1
  Bottom Layer w0.3: U4.2 39.5,16.15 40.2,15.45 41.6,15.45 42.509,14.541 R9.1 43.5,13.284 45.084,13.284 v1(45.75,13.95)
RT_CS: R16.2 U6.6 | length 3.3
  Bottom Layer w0.3: R16.2 38.21,26.465 38.675,26 39.575,26 39.77,26.195 U6.6
SCK: R11.2 R23.2 | length 15.2
  Top Layer w0.3: R23.2 34.46,8.61 35.95,10.1 v1(35.95,12.825)
  Bottom Layer w0.3: v1(35.95,12.825) 35.95,20.556 R11.2
SHORT: R14.2
TEC+: C28.2 C31.1 L4.1 P5.1 P5.2 U11.14 | length 18
  Top Layer w0.3: L4.1 12.455,21.72 16.475,17.7 U11.14 ; C31.1 22.275,17.6 U11.14 ; C28.2 24.585,16.24 23.125,17.7 U11.14
TEC-: P5.3 P5.4 R31.1 U11.15 | length 4.2
  Top Layer w0.3: U11.15@28.349,17.7 U11.15 29,17.7 31.053,15.647 R31.1
TEC_CS: R27.2 U8.6 | length 3.3
  Top Layer w0.3: R27.2 38.965,8.885 38.5,9.35 38.5,10.15 38.8,10.45 39.439,10.45 U8.6
THERM: R20.1 U7.3 | length 1.6
  Top Layer w0.3: R20.1 45.219,44.92 U7.3
VG_CS_CROSS: P5.10
pads on no net: P5.13 P5.14

## Polygon pours and split planes (outlines as drawn)
+5V on +5V "Top Layer-No Net" (solid, pour order 0): 0.5,0.5 0.5,49.5 49.5,49.5 49.5,0.5
GND on GND "Top Layer-No Net" (solid, pour order 2): 0.5,0.5 0.5,49.5 49.5,49.5 49.5,0.5

## Silkscreen, mask and mechanical layers (free items; w line width, h text height)
Mechanical 1:
  lines w0.254: 25,0 25,22.5 ; 0,0 0,50 50,50 50,0 0,0

## Text inside footprints (layer, text, board x,y; h text height)
P7: Bottom Overlay "1" at 49,18.766 h1.27; Bottom Overlay "2" at 49.508,21.306 h1.27; Bottom Overlay "4" at 42.904,21.306 h1.27; Bottom Overlay "3" at 42.904,18.766 h1.27
P8: Top Overlay "1" at 7.523,40.428 h1.27 r90; Top Overlay "2" at 4.983,39.92 h1.27 r90; Top Overlay "4" at 4.983,46.524 h1.27 r90; Top Overlay "3" at 7.523,46.524 h1.27 r90
U6: Bottom Overlay "*" at 41.37,23.693 h1.27 r270; Mechanical 13 "*" at 41.37,23.693 h1.27 r270
U8: Top Overlay "*" at 36.193,12.02 h1.27